# Altium PCB game_console_pcb.PcbDoc
Units mm, origin at the board's own origin, x right, y up, seen from the top; angles counter-clockwise.
Board outline 100.08 x 142.75 mm, 2 copper layers (Top Layer, Bottom Layer); 55 components, 48 nets, 201 pads, 75 vias.
Unrouted connection lines stored in the file: 1.
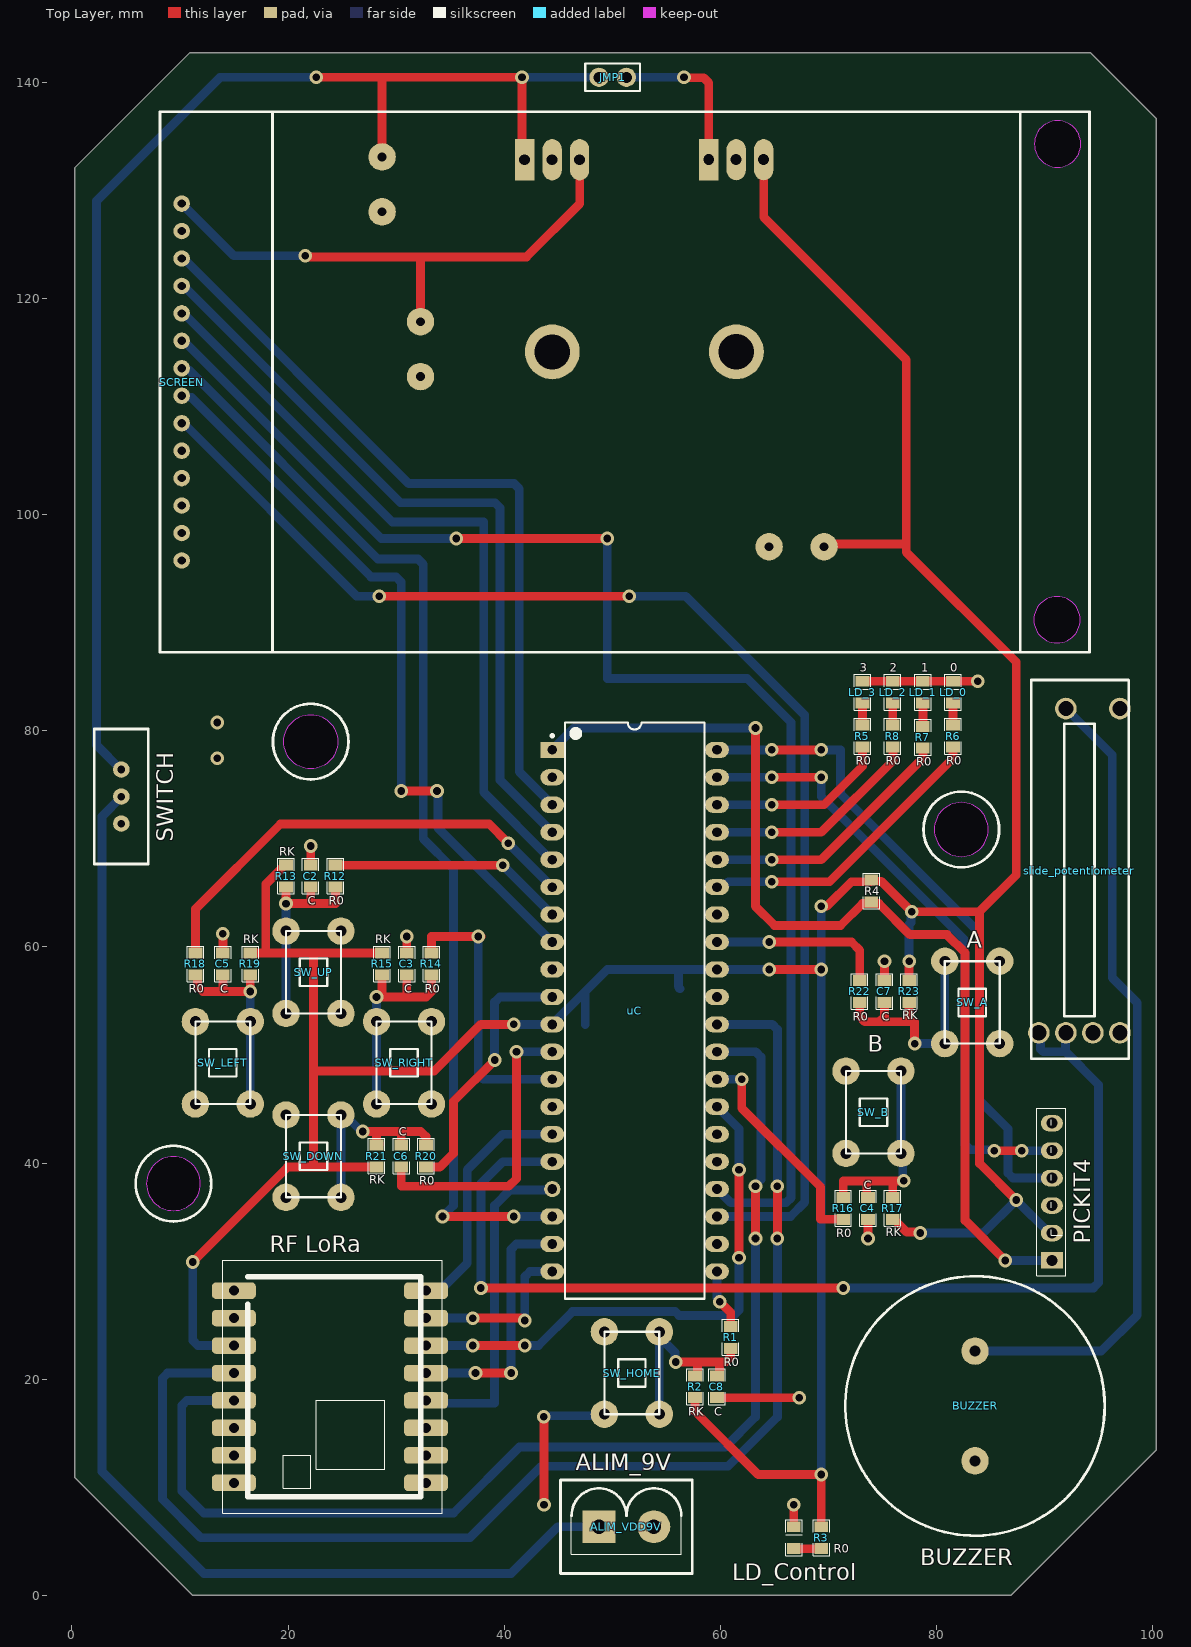
[diagram p0: Top Layer view]
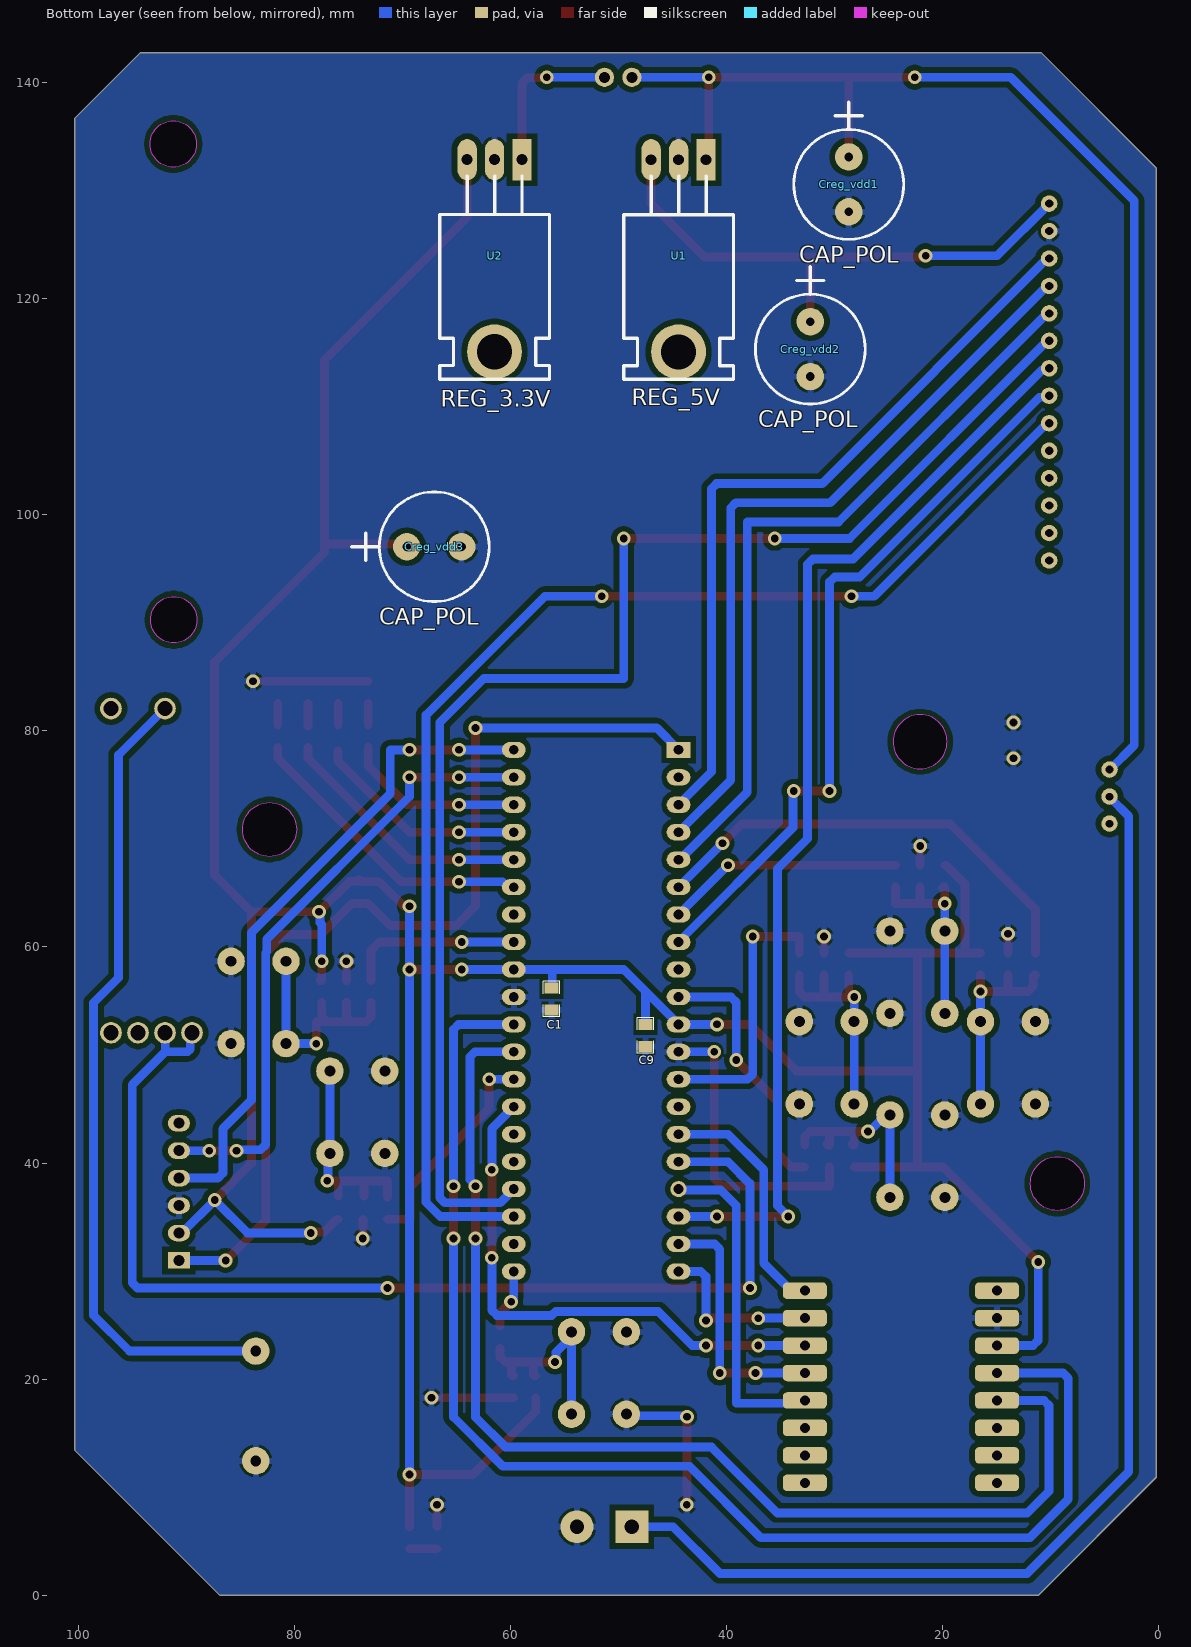
[diagram p1: Bottom Layer view, seen from below]
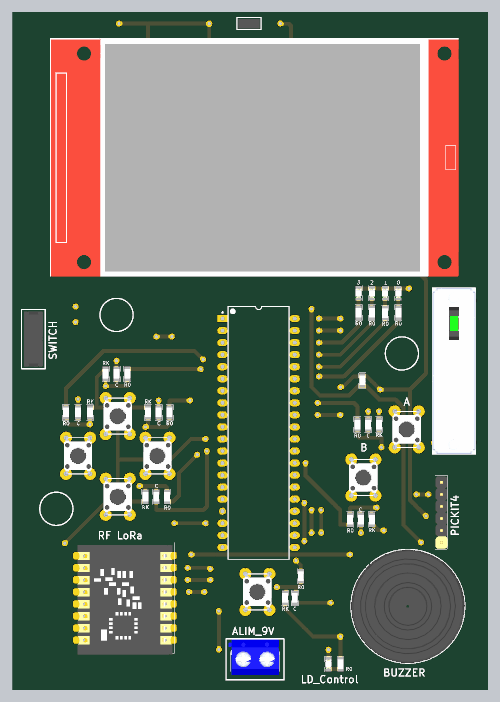
[diagram p2: 3D render of the assembled board from above, using the file's embedded part models]
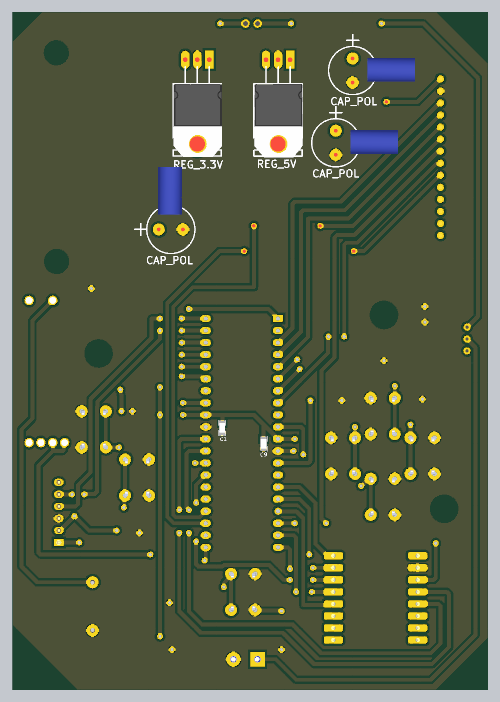
[diagram p3: 3D render of the assembled board from below, using the file's embedded part models]

## Layer stack, top to bottom
Top Solder: solder mask 0.0102, Solder Resist, Dk 3.5
Top Layer: signal copper 0.0356
Dielectric1: dielectric 0.32, FR-4, Dk 4.8
Bottom Layer: signal copper 0.0356
Bottom Solder: solder mask 0.0102, Solder Resist, Dk 3.5

## Board outline
0.254,10.922 0.254,132.08 10.922,142.748 94.234,142.748 100.33,136.652 100.33,13.462 86.868,0 11.176,0
cut-out: 89.008,90.27 ccw(c91.156,90.27) 91.156,88.122 ccw(c91.156,90.27) 93.304,90.27 ccw(c91.156,90.27) 91.156,92.418 ccw(c91.156,90.27)
cut-out: 89.058,134.298 ccw(c91.206,134.298) 91.206,132.15 ccw(c91.206,134.298) 93.354,134.298 ccw(c91.206,134.298) 91.206,136.446 ccw(c91.206,134.298)
cut-out: 79.796,70.866 ccw(c82.296,70.866) 82.296,68.366 ccw(c82.296,70.866) 84.796,70.866 ccw(c82.296,70.866) 82.296,73.366 ccw(c82.296,70.866)
cut-out: 22.098,76.494 cw(c22.098,78.994) 19.598,78.994 cw(c22.098,78.994) 22.098,81.494 cw(c22.098,78.994) 24.598,78.994 cw(c22.098,78.994)
cut-out: 6.898,38.1 ccw(c9.398,38.1) 9.398,35.6 ccw(c9.398,38.1) 11.898,38.1 ccw(c9.398,38.1) 9.398,40.6 ccw(c9.398,38.1)

## Design rules (kind name [scope] priority, off if disabled: settings)
Clearance Clearance_bottom_polygon [OnLayer('Bottom Layer') Or OnLayer('Multi-Layer') vs OnLayer('Bottom Layer')  And  InPoly] p1: gap=0.508 ignorepadtopadclearanceinfootprint=FALSE except(0: Arc-Hole Track-Hole SMDPad-Hole THPad-Hole Via-Hole Fill-Hole Poly-Hole Region-Hole Text-Hole)
Clearance Clearance_bottom_polygon_keepout [OnLayer('Bottom Layer') Or OnLayer('Multi-Layer') Or InPoly vs OnLayer('Keepout')] p2: gap=0 ignorepadtopadclearanceinfootprint=FALSE
Clearance Clearance_top_polygon [OnLayer('Top Layer')  Or OnLayer('Multi-Layer') vs OnLayer('Top Layer') And InPoly] p3: gap=0.508 ignorepadtopadclearanceinfootprint=FALSE except(0: Arc-Hole Track-Hole SMDPad-Hole THPad-Hole Via-Hole Fill-Hole Poly-Hole Region-Hole Text-Hole)
Clearance Clearance_bottom [OnLayer('Bottom Layer') Or OnLayer('Multi-Layer') vs OnLayer('Bottom Layer')  And Not InPoly] p4: gap=0.203 ignorepadtopadclearanceinfootprint=FALSE except(0: Arc-Hole Track-Hole SMDPad-Hole THPad-Hole Via-Hole Fill-Hole Poly-Hole Region-Hole Text-Hole)
Clearance Clearance_top [OnLayer('Top Layer')  Or OnLayer('Multi-Layer') vs OnLayer('Top Layer') And Not InPoly] p5: gap=0.203 ignorepadtopadclearanceinfootprint=FALSE except(0: Arc-Hole Track-Hole SMDPad-Hole THPad-Hole Via-Hole Fill-Hole Poly-Hole Region-Hole Text-Hole)
Clearance Clearance_pad_to_pad [OnLayer('Multi-Layer') vs OnLayer('Multi-Layer')] p6: gap=0.254 ignorepadtopadclearanceinfootprint=FALSE except(0: Arc-Hole Track-Hole SMDPad-Hole THPad-Hole Via-Hole Fill-Hole Poly-Hole Region-Hole Text-Hole)
ComponentClearance ComponentClearance_bottom [OnLayer('Bottom Overlay') vs OnLayer('Bottom Overlay')] p1: gap=0 collisioncheckmode=3 verticalgap=0.254 showdistances=FALSE
ComponentClearance ComponentClearance_top [OnLayer('Top Overlay') vs OnLayer('Top Overlay')] p2: gap=0 collisioncheckmode=3 verticalgap=0.254 showdistances=FALSE
FabricationTestPointUsage TestPointUsage [All] p1: valid=0 allowmultiple=FALSE
FabricationTestpoint Testpoint [All] p1: side=3 testpointundercomponent=TRUE minsize=1.016 maxsize=2.54 preferedsize=1.524 minholesize=0 maxholesize=1.016 preferedholesize=0.813 testpointgrid=0.025 allowsidetop=TRUE allowsidebottom=TRUE usegrid=TRUE gridtolerance=0
HoleSize [All] p1: absolutevalues=TRUE maxlimit=25.4 minlimit=0.406 maxpercent=80.000 minpercent=20.000
MinimumAnnularRing [PadXSize_AllLayers = PadYSize_AllLayers] p1: minimumring=0.254
PermittedLayers [All] p1: toplayerpermitted=TRUE bottomlayerpermitted=TRUE
PolygonConnect [All] p1: connectstyle=Relief reliefconductorwidth=0.61 reliefentries=4 polygonreliefangle="90 Angle" airgapwidth=0.254
RoutingVias [All] p1: holewidth=0.406 width=1.27 viastyle="Through Hole" minholewidth=0.406 minwidth=0.914 maxholewidth=25.4 maxwidth=25.4
SMDToPlane [All] p1: distance=0
SolderMaskExpansion [All] p1: expansion=0.102 istentingtop=FALSE
SupplyNets "Schematic Supply Nets_2" [InNet('GND')] p1: voltage=0.000
SupplyNets "Schematic Supply Nets_1" [InNet('VCC3.3V')] p2: voltage=0.000
SupplyNets "Schematic Supply Nets" [InNet('VCC5V')] p3: voltage=0.000
ViasUnderSMD [All] p1: allowed=FALSE
Width Width_botom_top [OnLayer('Bottom Layer') or OnLayer('Top Layer')] p1: maxlimit=254 minlimit=0.254 preferedwidth=0.813
26 further rules are at their usual default settings.

## Components (designator, comment, footprint, x,y, rotation, side; value= is the part's Value field where it differs from the comment)
ALIM_VDD9V "ALIM_9V" AMP_2 48.768,6.35 r0 top
BUZZER "BUZZER" BUZZER 83.566,17.526 r0 top
C1 "CAP" 0805 56.21,56.185 r270 bottom value=100n
C2 "C" 0805 22.098,65.532 r90 top value=100n
C3 "C" 0805 30.988,57.404 r90 top value=100n
C4 "C" 0805 73.66,36.83 r270 top value=100n
C5 "C" 0805 13.97,57.404 r90 top value=100n
C6 "C" 0805 30.48,41.656 r270 top value=100n
C7 "C" 0805 75.184,54.864 r90 top value=100n
C8 "C" 0805 59.69,20.32 r270 top value=100n
C9 "CAP" 0805 47.498,52.832 r270 bottom value=100n
Creg_vdd1 "CAP_POL" RB.2/.4 28.702,133.096 r90 bottom value=1u
Creg_vdd2 "CAP_POL" RB.2/.4 32.258,117.856 r90 bottom value=1u
Creg_vdd3 "CAP_POL" RB.2/.4 69.596,97.028 r0 bottom value=1u
JMP1 "JUMPER" JMP2-100 48.768,140.462 r0 top
LD_0 "0" LED0805 81.534,84.582 r270 top
LD_1 "1" LED0805 78.74,84.582 r270 top
LD_2 "2" LED0805 75.946,84.582 r270 top
LD_3 "3" LED0805 73.152,84.582 r270 top
LD_Control "comment" LED0805 66.802,6.35 r270 top
PICKIT4 "PIC-ICSP" PIC-ICSP 90.678,30.988 r0 top
R1 "R0" 0805 60.96,22.86 r90 top value=470
R2 "RK" 0805 57.658,20.32 r270 top value=4.7K
R3 "R0" 0805 69.342,4.318 r90 top value=470
R4 "RES" 0805 73.971,64.154 r90 top value=10K
R5 "R0" 0805 73.152,80.518 r270 top value=470
R6 "R0" 0805 81.534,80.518 r270 top value=470
R7 "R0" 0805 78.74,80.416 r270 top value=470
R8 "R0" 0805 75.946,80.518 r270 top value=470
R12 "R0" 0805 24.384,67.564 r270 top value=470
R13 "RK" 0805 19.812,65.532 r90 top value=4.7K
R14 "R0" 0805 33.274,57.404 r90 top value=470
R15 "RK" 0805 28.702,57.404 r90 top value=4.7K
R16 "R0" 0805 71.374,36.83 r270 top value=470
R17 "RK" 0805 75.946,36.83 r270 top value=4.7K
R18 "R0" 0805 11.43,57.404 r90 top value=470
R19 "RK" 0805 16.51,57.404 r90 top value=4.7K
R20 "R0" 0805 32.766,41.656 r270 top value=470
R21 "RK" 0805 28.194,41.656 r270 top value=4.7K
R22 "R0" 0805 72.898,54.864 r90 top value=470
R23 "RK" 0805 77.47,54.864 r90 top value=4.7K
"RF LoRa" "RF-LORA-868-SO" RF-LORA-868-DIP 14.986,28.194 r0 top
SCREEN "ILI9341" ILI9341_DISPLAY 8.16,137.268 r270 top
slide_potentiometer "slide_potentiometer" ptl_series_slide_potentiometer 93.218,67.056 r90 top
SW_A "A" KSA 85.852,51.054 r180 top
SW_B "B" KSA 71.628,48.514 r0 top
SW_DOWN "SW_PB" KSA 19.812,44.45 r0 top
SW_HOME "HOME" KSA 49.276,24.384 r0 top
SW_LEFT "SW_PB" KSA 11.43,53.086 r0 top
SW_RIGHT "SW_PB" KSA 33.274,45.466 r180 top
SW_UP "SW_PB" KSA 24.892,53.848 r180 top
SWITCH "SWITCH_SPDT_ON_ON_2" SW_MFP-161 4.572,73.914 r270 top
U1 "REG_5V" TO220H 41.9,132.837 r0 bottom
U2 "REG_3.3V" TO220H 58.928,132.842 r0 bottom
uC "PIC18F46K22-I/P" MCHP-PDIP-P40 52.07,54.102 r0 top

## Footprints (in the part's own frame and the unit in brackets; to place one, negate y for a bottom-side part, rotate by r counter-clockwise, add the part's x,y. Pads: shape width x height; smd on the part's side, far side on the other; paste and mask are expansions set on the pad)
0805 [mil]
  rect 40x50 smd: 1(0,0) 2(80,0)
  silkscreen extent -25,-30 105,30, body extent 1,-25 79,25, height 25
AMP_2 [mil]
  rect 120x120 hole 52: 1(0,0)
  round 120 hole 52: 2(200,0)
  silkscreen extent -140,-170 340,170, body extent -119,-130 299,165, height 394
BUZZER [mm]
  round 2.54 hole 1: 1(0,5.08) 2(0,-5.08)
  silkscreen extent -12,-12 12,12, body extent -12,-12 12,12, height 6.7
ILI9341_DISPLAY [mil]
  round 60 hole 30: 1(334.25,78.74) 2(434.25,78.74) 3(534.25,78.74) 4(634.25,78.74) 5(734.25,78.74) 6(834.25,78.74) 7(934.25,78.74) 8(1034.25,78.74) 9(1134.25,78.74) 10(1234.25,78.74) 11(1334.25,78.74) 12(1434.25,78.74) 13(1534.25,78.74) 14(1634.25,78.74)
  silkscreen extent 0,0 1969,3386, body extent 5,5 1974,3391, height 303
JMP2-100 [mil]
  round 70 hole 40: 1(0,0) 2(100,0)
  silkscreen extent -50,-50 150,50, body extent -39,-40 139,39, height 335
KSA [mil]
  round 100 hole 40: 1(200,-300) 2(200,0) 3(0,0) 4(0,-300)
  silkscreen extent 0,-300 200,0, body extent -18,-306 218,5, height 197
LED0805 [mil]
  rect 40x50 smd: A(80,0) K(0,0)
  silkscreen extent -25,-30 105,30, body extent 1,-25 79,25, height 31
MCHP-PDIP-P40 [mm] "PDIP, 40-Leads, Body 51.75x13.53mm, Pitch 2.54mm"
  rect 2.2x1.5 hole 0.9: 1(-7.62,24.13)
  oval 2.2x1.5 hole 0.9: 2(-7.62,21.59) 3(-7.62,19.05) 4(-7.62,16.51) 5(-7.62,13.97) 6(-7.62,11.43) 7(-7.62,8.89) 8(-7.62,6.35) 9(-7.62,3.81) 10(-7.62,1.27) 11(-7.62,-1.27) 12(-7.62,-3.81) 13(-7.62,-6.35) 14(-7.62,-8.89) 15(-7.62,-11.43) 16(-7.62,-13.97) 18(-7.62,-19.05) 19(-7.62,-21.59) 20(-7.62,-24.13) 21(7.62,-24.13) 22(7.62,-21.59) 23(7.62,-19.05) 24(7.62,-16.51) 25(7.62,-13.97) 26(7.62,-11.43) 27(7.62,-8.89) 28(7.62,-6.35) 29(7.62,-3.81) 30(7.62,-1.27) 31(7.62,1.27) 32(7.62,3.81) 33(7.62,6.35) 34(7.62,8.89) 35(7.62,11.43) 36(7.62,13.97) 37(7.62,16.51) 38(7.62,19.05) 39(7.62,21.59) 40(7.62,24.13)
  round 1.5 hole 0.9: 17(-7.62,-16.51)
  silkscreen extent -7.74,-26.65 6.45,26.65, body extent -7.76,-26.6 7.76,26.6, height 6.35
PIC-ICSP [mil]
  rect 80x60 hole 40: 1(0,0)
  oval 80x60 hole 40: 2(0,100) 3(0,200) 4(0,300) 5(0,400) 6(0,500)
  silkscreen extent -55,-55 50,555, body extent -50,-50 48,550, height 339
ptl_series_slide_potentiometer [mm]
  round 2 hole 1.4: 1(-15,1.25) 3(15,1.25) B(15,-3.75) E(-15,-3.75) L(-15,-1.25)
  round 2 hole 1.4 paste-2539.97: 2(-15,3.75)
  silkscreen extent -17.4,-4.57 17.65,4.45, body extent -17.37,-4.57 17.63,4.43, height 18
RB.2/.4 [mil]
  round 100 hole 32: 1(0,0) 2(-200,0)
  silkscreen extent -300,-200 200,200, body extent -192,-517 5,-123, height 203
RF-LORA-868-DIP [mil]
  rrect50% 160x60 hole 36: 1(0,0) 2(0,-100) 3(0,-200) 4(0,-300) 5(0,-400) 6(0,-500) 7(0,-600) 8(0,-700) 9(700,-700) 10(700,-600) 11(700,-500) 12(700,-400) 13(700,-300) 14(700,-200) 15(700,-100) 16(700,0)
  silkscreen extent -40,-810 760,110, body extent -43,-821 743,91, height 79
SW_MFP-161 [mil]
  round 60 hole 27.56: 1(-98.43,0) 2(0,0) 3(98.43,0)
  silkscreen extent -246,-98 246,98, body extent -228,-79 228,79, height 276
TO220H [mil]
  round 200 hole 128: 0(100.39,699.8)
  rect 70x150 hole 40: 1(0,0)
  oval 70x150 hole 40: 2(100,0) 3(200,0)
  silkscreen extent -100,60 300,800, body extent -105,200 297,810, height 189

## Part data
ALIM_VDD9V: library part POWER2, "connecteur alim 2 pôles"
C1 C9: "capacité non polarisée"
C2 C3 C4 C5 C6 C7 C8: library part CAP, "capacité non polarisée"
Creg_vdd1 Creg_vdd2 Creg_vdd3: "capacité polarisée"
JMP1: library part JUMPER2, "cavalier 1 position"
LD_0 LD_1 LD_2 LD_3 LD_Control: library part LED, "LED 5mm/3mm/CMS"
R1 R2 R3 R5 R6 R7 R8 R12 R13 R14 R15 R16 R17 R18 R19 R20 R21 R22 R23: library part RES, "resistance"
R4: "resistance"
SCREEN: library part 2478, "Resistive Graphic LCD Display Module Red, Green, Blue (RGB) TFT - Color Parallel, 8-Bit, SPI 2.4 (60.96mm) 240 x 320", Package="NON STANDARD Adafruit", Availability="In Stock", Check_prices=https://www.snapeda.com/parts/2478/Adafruit+Industries+LLC/view-part/?ref=eda, MF="Adafruit Industries", MP=2478, Price=None, SnapEDA_Link=https://www.snapeda.com/parts/2478/Adafruit+Industries+LLC/view-part/?ref=snap
SW_A SW_B SW_HOME: library part SW_PB
U1 U2: library part REG_POS, "régulateur positif fixe"
uC: "Low-Power, High-Performance Microcontroller with XLP Technology, 64 MHz, 35 I/O, -40 to 85 degC, 40-pin PDIP (P40), Tube", Manufacturer=Microchip, Operation Voltage Range="2.3V - 5.5V", Supplier Part Number 1=PIC18F46K22-I/P-ND, # of A/D Channels=28, ComponentLink1Description=Datasheet, ComponentLink1URL=http://ww1.microchip.com/downloads/en/DeviceDoc/41412F.pdf, ComponentLink2Description="Package Specification", ComponentLink2URL=http://www.microchip.com/stellent/groups/techpub_sg/documents/packagingspec/en012702.pdf, ComponentLink3Description="URL Link1", ComponentLink3URL="Product URL:http://www.microchip.com/datasheet/PIC18F46K22", DatasheetVersion="Rev. F", Digital Communication="2 -A/E/USART, 2 -MSSP(SPI/I2C)", EEPROM Data Memory (bytes)=1024, I/O Pins=35, Internal Oscillator="16 MHz, 31 kHz", Max. CPU Speed MHz=64, Memory Type=Flash, Mounting Technology="Through Hole", PackageDescription="40-Lead Plastic Dual In-Line Package, Body 51.75 x 13.53 mm, Pitch 2.54 mm", PackageReference=PDIP-P40, PackageVersion="C04-016B, 04/2013", Packing=TUBE, PartNumber=PIC18F46K22-I/P, Program Memory KBytes=64, Program Memory KWords=32, RAM=3896, RoHS=TRUE, Supplier 1=Digi-Key, Supplier 2=Farnell, Supplier 3=Newark, Supplier 4=Mouser, Supplier Part Number 2=1814979, Supplier Part Number 3=65R6012, Supplier Part Number 4=579-PIC18F46K22IP, Timers="3 - 8-bit, 4 - 16-bit"

## Via types
v1: diameter 1.27, hole 0.711, Top Layer to Bottom Layer, 75 vias

## Nets (pads, with @x,y where several pads share a name; then routed paths per layer and width w, separated by ;. In a path a pad name is that pad's centre, name@x,y a point inside that pad or via, vN(x,y) a via of type N, cw(c..) or ccw(c..) an arc to the next point about the centre after c; other vN are vias at no path point)
B-A: R22.2 uC.33 | length 16.5
  Top Layer w0.813: uC.33 uC.33@59.876,60.452 ; v1(64.516,60.452) 72.136,60.452 72.898,59.69 R22.2
  Bottom Layer w0.813: uC.33 v1(64.516,60.452)
B-B: R16.2 uC.28 | length 20.5
  Top Layer w0.813: uC.28 uC.28@59.821,47.883 ; v1(61.976,47.752) 61.976,45.085 69.279,37.782 69.279,34.798 ; 69.342,34.798 R16.2
  Bottom Layer w0.813: uC.28 v1(61.976,47.752)
B-DOWN: R20.2 uC.10 | length 24.2
  Top Layer w0.813: R20.2 34.036,39.624 35.306,40.894 35.306,45.72 v1(39.116,49.53)
  Bottom Layer w0.813: v1(39.116,49.53) 39.116,54.896 39.592,55.372 uC.10
B-HOME: R1.2 uC.21 | length 5.6
  Top Layer w0.813: v1(59.944,27.178) 60.96,26.162 R1.2
  Bottom Layer w0.813: uC.21 59.69,27.556 59.944,27.302 v1(59.944,27.178)
B-LEFT: R18.2 uC.6 | length 42.8
  Top Layer w0.813: R18.2 11.43,63.5 19.304,71.374 38.608,71.374 v1(40.386,69.596)
  Bottom Layer w0.813: v1(40.386,69.596) uC.6
B-RIGHT: R14.2 uC.13 | length 26.1
  Top Layer w0.813: R14.2 33.274,60.96 v1@37.846,60.96 ; uC.13@44.264,47.752 uC.13
  Bottom Layer w0.813: v1(37.592,60.96) 37.592,48.228 38.068,47.752 uC.13
B-UP: R12.1 uC.7 | length 21.5
  Top Layer w0.813: R12.1 v1@39.37,67.564
  Bottom Layer w0.813: v1(39.878,67.564) uC.7
BUZZER: BUZZER.1 slide_potentiometer.3 | length 75.3
  Bottom Layer w0.813: BUZZER.1 95.25,22.606 98.578,25.934 98.578,54.838 96.266,57.15 96.266,77.758 slide_potentiometer.3
GND: "RF LoRa.2" ALIM_VDD9V.2 BUZZER.2 C1.2 C2.2 C3.2 C4.2 C5.2 C6.2 C7.2 C8.2 C9.2 Creg_vdd1.2 Creg_vdd2.2 Creg_vdd3.2 LD_0.K LD_1.K LD_2.K LD_3.K LD_Control.K PICKIT4.3 SCREEN.2 SW_A.3 SW_A.4 SW_B.3 SW_B.4 SW_DOWN.3 SW_DOWN.4 SW_HOME.3 SW_HOME.4 SW_LEFT.3 SW_LEFT.4 SW_RIGHT.3 SW_RIGHT.4 SW_UP.3 SW_UP.4 U1.2 U2.2 uC.12 uC.31 | length 71.1
  Top Layer w0.813: C5.2 v1(13.97,61.214) ; C2.2 v1(22.098,69.342) ; C6.2 30.48,37.846 40.418,37.846 41.148,38.576 v1(41.148,50.292) ; C3.2 v1(30.988,60.96) ; v1(43.672,16.526) 43.68,16.518 43.68,8.39 v1(43.688,8.382) ; C8.2 v1(67.31,18.288) ; LD_Control.K v1(66.802,8.382) ; LD_3.K LD_2.K LD_1.K v1(83.82,84.582) ; C4.2@73.57,34.708 C4.2 v1(73.66,33.02) ; C7.2 v1(75.184,58.674)
  Bottom Layer w0.813: v1(41.148,50.292) uC.12 ; v1(43.672,16.526) 43.76,16.613 49.125,16.613 SW_HOME.4 SW_HOME.4@49.588,17.076
  other v1: 13.462,77.47 13.462,80.772
L-CS: "RF LoRa.16" uC.15 | length 22.7
  Bottom Layer w0.813: 32.766,28.194 34.036,28.194 36.576,30.734 36.576,39.37 39.878,42.672 uC.15
L-RESET: "RF LoRa.12" uC.17 | length 30.9
  Top Layer w0.813: uC.17@44.319,37.723 uC.17
  Bottom Layer w0.813: 32.766,18.034 33.02,17.78 39.116,17.78 39.116,36.068 40.568,37.52 44.378,37.52 uC.17
L-RX: "RF LoRa.5" uC.29 | length 109.3
  Top Layer w0.813: 13.716,18.034 14.986,18.034 ; v1@63.246,33.274 v1(63.246,37.846)
  Bottom Layer w0.813: 14.986,18.034 10.636,18.034 10.16,17.558 10.16,9.652 12.192,7.62 35.306,7.62 41.402,13.716 60.452,13.716 63.246,16.51 v1(63.246,33.02) ; uC.29 63.278,50.292 63.754,49.816 63.754,38.478 63.246,37.97 v1(63.246,37.846)
L-SCLK: "RF LoRa.13" uC.19 | length 23.3
  Top Layer w0.813: v1(37.338,20.574) v1(40.64,20.574)
  Bottom Layer w0.813: 32.766,20.574 v1(37.338,20.574) ; v1(40.64,20.574) 40.64,32.036 41.116,32.512 uC.19
L-SDI: "RF LoRa.15" uC.20 | length 16
  Top Layer w0.813: v1(37.084,25.654) 41.558,25.654 41.786,25.425 v1(41.91,25.425)
  Bottom Layer w0.813: 32.766,25.654 v1(37.084,25.654) ; v1(41.91,25.425) 41.91,29.496 42.386,29.972 uC.20
L-SDO: "RF LoRa.14" uC.27 | length 50.3
  Top Layer w0.813: v1(37.084,23.114) v1(41.91,23.114) ; v1(61.722,31.242) v1(61.722,39.37)
  Bottom Layer w0.813: 32.766,23.114 v1(37.084,23.114) ; v1(41.91,23.114) 43.18,23.114 46.33,26.264 55.821,26.264 56.177,25.908 61.246,25.908 61.722,26.384 v1(61.722,31.242) ; uC.27 61.722,43.18 v1(61.722,39.37)
L-TX: "RF LoRa.4" uC.30 | length 123.7
  Top Layer w0.813: 13.716,20.574 14.986,20.574 ; v1@65.278,33.274 v1(65.278,37.846)
  Bottom Layer w0.813: 14.986,20.574 8.858,20.574 8.382,20.098 8.382,8.89 11.938,5.334 36.83,5.334 43.434,11.938 60.706,11.938 65.278,16.51 v1(65.278,33.02) ; uC.30 64.802,52.832 65.278,52.356 v1(65.278,37.846)
LED0: R6.2 uC.35 | length 27.8
  Top Layer w0.813: v1(64.77,66.04) 70.104,66.04 81.534,77.47 R6.2@81.534,78.448
  Bottom Layer w0.813: uC.35 60.226,65.532 60.734,66.04 v1(64.77,66.04)
LED1: R7.2 uC.36 | length 24
  Top Layer w0.813: v1(64.77,68.072) 69.342,68.072 78.74,77.47 R7.2@78.74,78.485
  Bottom Layer w0.813: uC.36 v1(64.77,68.072)
LED2: R8.2 uC.37 | length 19.9
  Top Layer w0.813: v1(64.77,70.612) 69.342,70.612 75.971,77.241 R8.2@75.971,78.13
  Bottom Layer w0.813: uC.37 v1(64.77,70.612)
LED3: R5.2 uC.38 | length 16.7
  Top Layer w0.813: v1(64.77,73.152) 69.596,73.152 73.152,76.708 R5.2
  Bottom Layer w0.813: uC.38 v1(64.77,73.152)
NetALIM_VDD9V_1: ALIM_VDD9V.1 SWITCH.2 | length 114.8
  Bottom Layer w0.813: SWITCH.2@4.572,73.874 2.794,72.096 2.794,64.516 2.794,11.43 12.192,2.032 40.64,2.032 44.958,6.35 ALIM_VDD9V.1
NetC2_1: C2.1 R12.2 R13.1 SW_UP.1 SW_UP.2 | length 19.6
  Top Layer w0.813: R13.1@20.041,65.43 19.939,65.532 R13.1 v1(19.812,64.008) 22.098,64.008 ; C2.1 22.098,64.008 ; R12.2 24.384,64.008 22.098,64.008
  Bottom Layer w0.813: SW_UP.2 SW_UP.1 v1(19.812,64.008)
NetC3_1: C3.1 R14.1 R15.1 SW_RIGHT.1 SW_RIGHT.2 | length 19.5
  Top Layer w0.813: v1(28.194,55.372) 30.988,55.372 ; 28.702,55.88 R15.1 ; C3.1 30.988,55.372 ; R14.1 33.274,55.848 32.798,55.372 30.988,55.372
  Bottom Layer w0.813: SW_RIGHT.2 SW_RIGHT.1 ; SW_RIGHT.1@28.194,53.848 v1(28.194,55.372)
NetC4_1: C4.1 R16.1 R17.1 SW_B.1 SW_B.2 | length 19.2
  Top Layer w0.813: R16.1 71.374,38.354 75.946,38.354 ; C4.1@73.547,36.932 73.547,37.959 ; R17.1@75.946,36.932 75.946,38.208 76.092,38.354 v1(76.962,38.354)
  Bottom Layer w0.813: SW_B.2@76.708,48 SW_B.1 76.875,40.727 76.875,38.441 v1(76.962,38.354)
NetC5_1: C5.1 R18.1 R19.1 SW_LEFT.1 SW_LEFT.2 | length 19.7
  Top Layer w0.813: R18.1 11.522,57.404 11.624,57.302 11.624,56.356 12.1,55.88 13.97,55.88 ; C5.1 13.97,55.88 ; v1@16.386,55.967 16.51,56.091 R19.1 ; v1(16.51,55.88) 13.97,55.88
  Bottom Layer w0.813: SW_LEFT.1 SW_LEFT.2 v1(16.51,55.88)
NetC6_1: C6.1 R20.1 R21.1 SW_DOWN.1 SW_DOWN.2 | length 20.2
  Top Layer w0.813: SW_DOWN.2 SW_DOWN.2@25.276,44.45 ; v1@26.8,42.926 v1(26.924,42.926) 28.194,42.926 ; R21.1@28.423,41.758 28.321,41.656 R21.1 28.194,42.926 ; C6.1@30.704,41.758 30.602,41.656 C6.1 30.48,42.926 ; R20.1 32.766,42.45 32.29,42.926 30.48,42.926 ; 28.194,42.926 30.48,42.926
  Bottom Layer w0.813: SW_DOWN.1 SW_DOWN.2 ; SW_DOWN.2@25.276,44.45 v1@26.8,42.926
NetC7_1: C7.1 R22.1 R23.1 SW_A.1 SW_A.2 | length 23
  Top Layer w0.813: R22.1 72.898,53.562 73.374,53.086 74.708,53.086 ; C7.1 75.184,53.562 74.708,53.086 ; R23.1 77.47,53.562 76.994,53.086 ; v1(77.978,51.054) 77.978,53.086 76.994,53.086 ; 74.708,53.086 76.994,53.086
  Bottom Layer w0.813: v1(77.978,51.054) SW_A.2 SW_A.1
NetC8_1: C8.1 R1.1 R2.1 SW_HOME.1 SW_HOME.2 | length 20.6
  Top Layer w0.813: SW_HOME.2@54.356,23.917 SW_HOME.2 ; v1(55.88,21.59) 57.887,21.59 59.919,21.59 60.484,21.59 60.96,22.066 R1.1 ; R2.1 57.785,20.32 57.887,20.422 57.887,21.342 58.134,21.59 ; C8.1 59.817,20.32 59.919,20.422 59.919,21.463 60.046,21.59
  Bottom Layer w0.813: SW_HOME.2@54.044,24.072 SW_HOME.2 SW_HOME.2@54.356,23.917 ; SW_HOME.1 SW_HOME.2@54.356,23.917 ; v1(55.88,21.59) 55.793,21.677 55.793,22.48 SW_HOME.2@54.356,23.917
NetCreg_vdd1_1: Creg_vdd1.1 JMP1.1 SWITCH.1 U1.1 | length 119.9
  Top Layer w0.813: v1(22.606,140.462) 28.702,140.462 ; Creg_vdd1.1 28.702,140.462 ; U1.1@41.91,132.842 41.656,133.096 v1(41.656,140.462) 28.702,140.462
  Bottom Layer w0.813: SWITCH.1@4.572,76.374 2.286,78.66 2.286,129.032 13.716,140.462 v1(22.606,140.462) ; v1(41.656,140.462) JMP1.1
NetJMP1_2: JMP1.2 U2.1 | length 14.9
  Top Layer w0.813: v1(56.642,140.462) 56.674,140.43 58.452,140.43 58.928,139.954 U2.1
  Bottom Layer w0.813: JMP1.2 v1(56.642,140.462)
NetLD_0_A: LD_0.A R6.1 | length 2
  Top Layer w0.813: R6.1 LD_0.A
NetLD_1_A: LD_1.A R7.1 | length 2.1
  Top Layer w0.813: R7.1 LD_1.A
NetLD_2_A: LD_2.A R8.1 | length 2
  Top Layer w0.813: R8.1 LD_2.A
NetLD_3_A: LD_3.A R5.1 | length 2
  Top Layer w0.813: R5.1 LD_3.A
NetLD_Control_A: LD_Control.A R3.1 | length 2.5
  Top Layer w0.813: LD_Control.A R3.1
NetPICKIT4_1: PICKIT4.1 R4.1 uC.1 | length 93.3
  Top Layer w0.813: v1(63.246,80.264) 63.246,63.754 65.024,61.976 71.12,61.976 73.152,64.008 74.676,64.008 77.542,61.142 80.962,61.142 82.652,59.453 82.652,34.696 v1(86.36,30.988)
  Bottom Layer w0.813: uC.1 46.482,80.264 v1(63.246,80.264) ; v1(86.36,30.988) PICKIT4.1
PGC: PICKIT4.5 uC.39 | length 57.4
  Top Layer w0.813: v1(64.77,75.692) v1(69.342,75.692) ; v1(85.344,41.148) v1(87.884,41.148)
  Bottom Layer w0.813: uC.39 v1(64.77,75.692) ; v1(69.342,75.692) 69.342,73.914 82.55,60.706 82.55,59.554 82.652,59.453 82.652,41.712 83.128,41.235 85.257,41.235 v1(85.344,41.148) ; v1(87.884,41.148) PICKIT4.5
PGD: PICKIT4.4 uC.40 | length 61.3
  Top Layer w0.813: v1(64.77,78.232) v1(69.342,78.232)
  Bottom Layer w0.813: uC.40 v1(64.77,78.232) ; v1(69.342,78.232) 71.12,78.232 71.12,74.168 83.972,61.316 83.972,45.822 86.614,43.18 86.614,39.084 87.09,38.608 PICKIT4.4
POT: slide_potentiometer.1 slide_potentiometer.2 uC.16 | length 102.8
  Top Layer w0.813: v1(37.846,28.448) v1(71.374,28.448) ; slide_potentiometer.2 slide_potentiometer.2@89.638,51.886 ; slide_potentiometer.1@91.948,52.036 slide_potentiometer.1
  Bottom Layer w0.813: v1(37.846,28.448) 37.846,38.1 39.878,40.132 uC.16 ; v1(71.374,28.448) 94.52,28.448 94.996,28.924 94.996,47.244 91.948,50.292 ; slide_potentiometer.2@89.638,51.886 89.638,50.538 89.884,50.292 91.948,50.292 ; slide_potentiometer.1@91.948,52.036 91.948,50.292
S-BL: SCREEN.8 uC.8 | length 68.5
  Top Layer w0.813: v1(30.48,74.422) v1(33.782,74.422)
  Bottom Layer w0.813: SCREEN.8 10.296,110.862 11.058,110.862 27.686,94.234 30.004,94.234 30.48,93.758 v1(30.48,74.422) ; v1(33.782,74.422) 33.869,74.335 33.869,71.033 uC.8
S-CLK: SCREEN.7 uC.18 | length 102
  Top Layer w0.813: v1(34.29,35.052) v1(40.894,35.052)
  Bottom Layer w0.813: SCREEN.7 10.296,113.402 10.804,113.402 28.321,95.885 32.036,95.885 32.512,95.409 32.512,70.007 35.306,67.213 35.306,36.068 v1(34.29,35.052) ; v1(40.894,35.052) uC.18
S-CS: SCREEN.3 uC.3 | length 70.6
  Bottom Layer w0.813: SCREEN.3@10.186,123.854 31.17,102.87 40.926,102.87 41.402,102.394 41.402,76.2 uC.3
S-D/C: SCREEN.5 uC.5 | length 69.8
  Bottom Layer w0.813: SCREEN.5@10.186,118.774 29.646,99.314 38.1,99.314 38.1,74.31 uC.5@44.338,68.072
S-MISO: SCREEN.9 uC.23 | length 122.6
  Top Layer w0.813: v1(28.448,92.456) v1(51.562,92.456)
  Bottom Layer w0.813: SCREEN.9@10.186,108.614 26.344,92.456 v1(28.448,92.456) ; v1(51.562,92.456) 56.809,92.456 67.818,81.447 67.818,36.377 66.493,35.052 uC.23
S-MOSI: SCREEN.6 uC.24 | length 130.2
  Top Layer w0.813: v1(35.56,97.79) v1(49.53,97.79)
  Bottom Layer w0.813: SCREEN.6@10.186,116.234 28.63,97.79 v1(35.56,97.79) ; v1(49.53,97.79) 49.53,84.836 62.484,84.836 66.548,80.772 66.548,36.798 66.072,36.322 60.96,36.322 uC.24
S-RST: SCREEN.4 uC.4 | length 70
  Bottom Layer w0.813: SCREEN.4@10.186,121.314 30.408,101.092 39.148,101.092 39.624,100.616 39.624,75.438 uC.4
VCC3.3V: "RF LoRa.3" C1.1 C9.1 Creg_vdd3.1 PICKIT4.2 R2.2 R3.2 R4.2 R13.2 R15.2 R17.2 R19.2 R21.2 R23.2 U2.3 uC.11 uC.32 | length 360.6
  Top Layer w0.813: v1(11.176,30.852) 19.948,39.624 22.352,39.624 ; 13.716,23.114 14.986,23.114 ; R19.2 18.034,59.436 ; R13.2 19.685,67.564 17.932,65.811 17.932,59.538 18.034,59.436 ; R21.2 22.352,39.624 ; R15.2 22.352,59.436 ; v1(40.894,52.832) 37.846,52.832 33.528,48.514 22.352,48.514 ; R2.2 57.658,17.018 63.5,11.176 v1(69.342,11.176) R3.2 ; U2.3 64.008,127.508 77.202,114.314 77.202,97.282 ; v1(64.516,57.912) v1(69.342,57.912) ; v1(69.342,63.754) 69.85,63.754 72.136,66.04 R4.2@73.971,66.04 ; Creg_vdd3.1 69.85,97.282 77.202,97.282 ; R4.2@74.098,66.186 R4.2 74.073,66.084 74.886,66.084 v1(77.724,63.246) 83.972,63.246 ; R17.2 76.073,34.798 77.256,33.615 78.399,33.615 v1(78.486,33.528) ; v1(77.47,58.674) R23.2 R23.2@77.597,56.896 ; v1(87.376,36.576) 83.98,39.972 83.972,39.972 83.972,63.246 ; PICKIT4.2@90.416,33.528 PICKIT4.2 ; 18.034,59.436 22.352,59.436 ; 22.352,39.624 22.352,48.514 ; 22.352,48.514 22.352,59.436 ; 77.202,97.282 77.202,96.534 87.376,86.36 87.376,66.65 83.972,63.246
  Bottom Layer w0.813: v1(11.176,30.852) 11.176,23.59 11.652,23.114 14.986,23.114 ; v1(40.894,52.832) uC.11 47.498,55.88 ; C9.1 47.498,55.88 ; C1.1@56.261,56.134 C1.1 56.159,56.236 56.159,56.363 56.134,56.388 56.134,57.912 ; v1(64.516,57.912) uC.32 56.134,57.912 ; v1(69.342,11.176) v1@69.342,57.701 ; v1(69.342,57.912) v1(69.342,63.754) ; v1(77.47,58.674) 77.47,62.106 77.637,62.273 77.637,63.159 v1(77.724,63.246) ; v1(78.486,33.528) 84.328,33.528 v1(87.376,36.576) 90.424,33.528 PICKIT4.2 ; 47.498,55.88 49.53,57.912 56.134,57.912
VCC5V: Creg_vdd2.1 SCREEN.1 U1.3 | length 50.9
  Top Layer w0.813: v1@21.59,123.85 32.258,123.85 ; Creg_vdd2.1 32.258,123.85 ; U1.3@46.99,132.842 46.99,128.778 42.062,123.85 32.258,123.85
  Bottom Layer w0.813: SCREEN.1 14.986,123.952 v1(21.59,123.952)
pads on no net: "RF LoRa.1" "RF LoRa.6" "RF LoRa.7" "RF LoRa.8" "RF LoRa.9" "RF LoRa.10" "RF LoRa.11" PICKIT4.6 SCREEN.10 SCREEN.11 SCREEN.12 SCREEN.13 SCREEN.14 slide_potentiometer.B slide_potentiometer.E slide_potentiometer.L SWITCH.3 U1.0 U2.0 uC.2 uC.9 uC.14 uC.22 uC.25 uC.26 uC.34

## Polygon pours and split planes (outlines as drawn)
GND on Bottom Layer "GND_L02_P001" (solid, pour order 1): 100.33,136.652 94.234,142.748 10.922,142.748 0.254,132.08 0.254,10.922 11.176,0 86.868,0 100.33,13.462

## Keep-outs
Keep-Out Layer:
  rectangle: -103.103,-29.192 -98.103,170.808
  rectangle: -98.103,-29.192 191.897,-24.192
  rectangle: 186.897,-24.192 191.897,170.808
  rectangle: -98.103,165.808 186.897,170.808

## Silkscreen, mask and mechanical layers (free items; w line width, h text height)
Top Overlay:
  circle w0.254: c22.098,78.994 r3.5
  circle w0.254: c9.398,38.1 r3.5
  circle w0.254: c82.296,70.866 r3.5
Board Shape:
  circle w0.25: c91.206,134.298 r2.148
  circle w0.25: c91.156,90.27 r2.148
  circle w0.254: c82.296,70.866 r2.5
  circle w0.254: c9.398,38.1 r2.5
  circle w0.25: c22.098,78.994 r2.5
  lines w0.305: 0.254,10.922 11.176,0 86.868,0 100.33,13.462 100.33,136.652 94.234,142.748 10.922,142.748 0.254,132.08 0.254,10.922